# Altium PCB 6502_VGA.PcbDoc
Units mil, origin at the board's own origin, x right, y up, seen from the top; angles counter-clockwise.
Board outline 4705 x 3485 mil, 2 copper layers (Top Layer, Bottom Layer); 33 components, 97 nets, 445 pads, 29 vias.
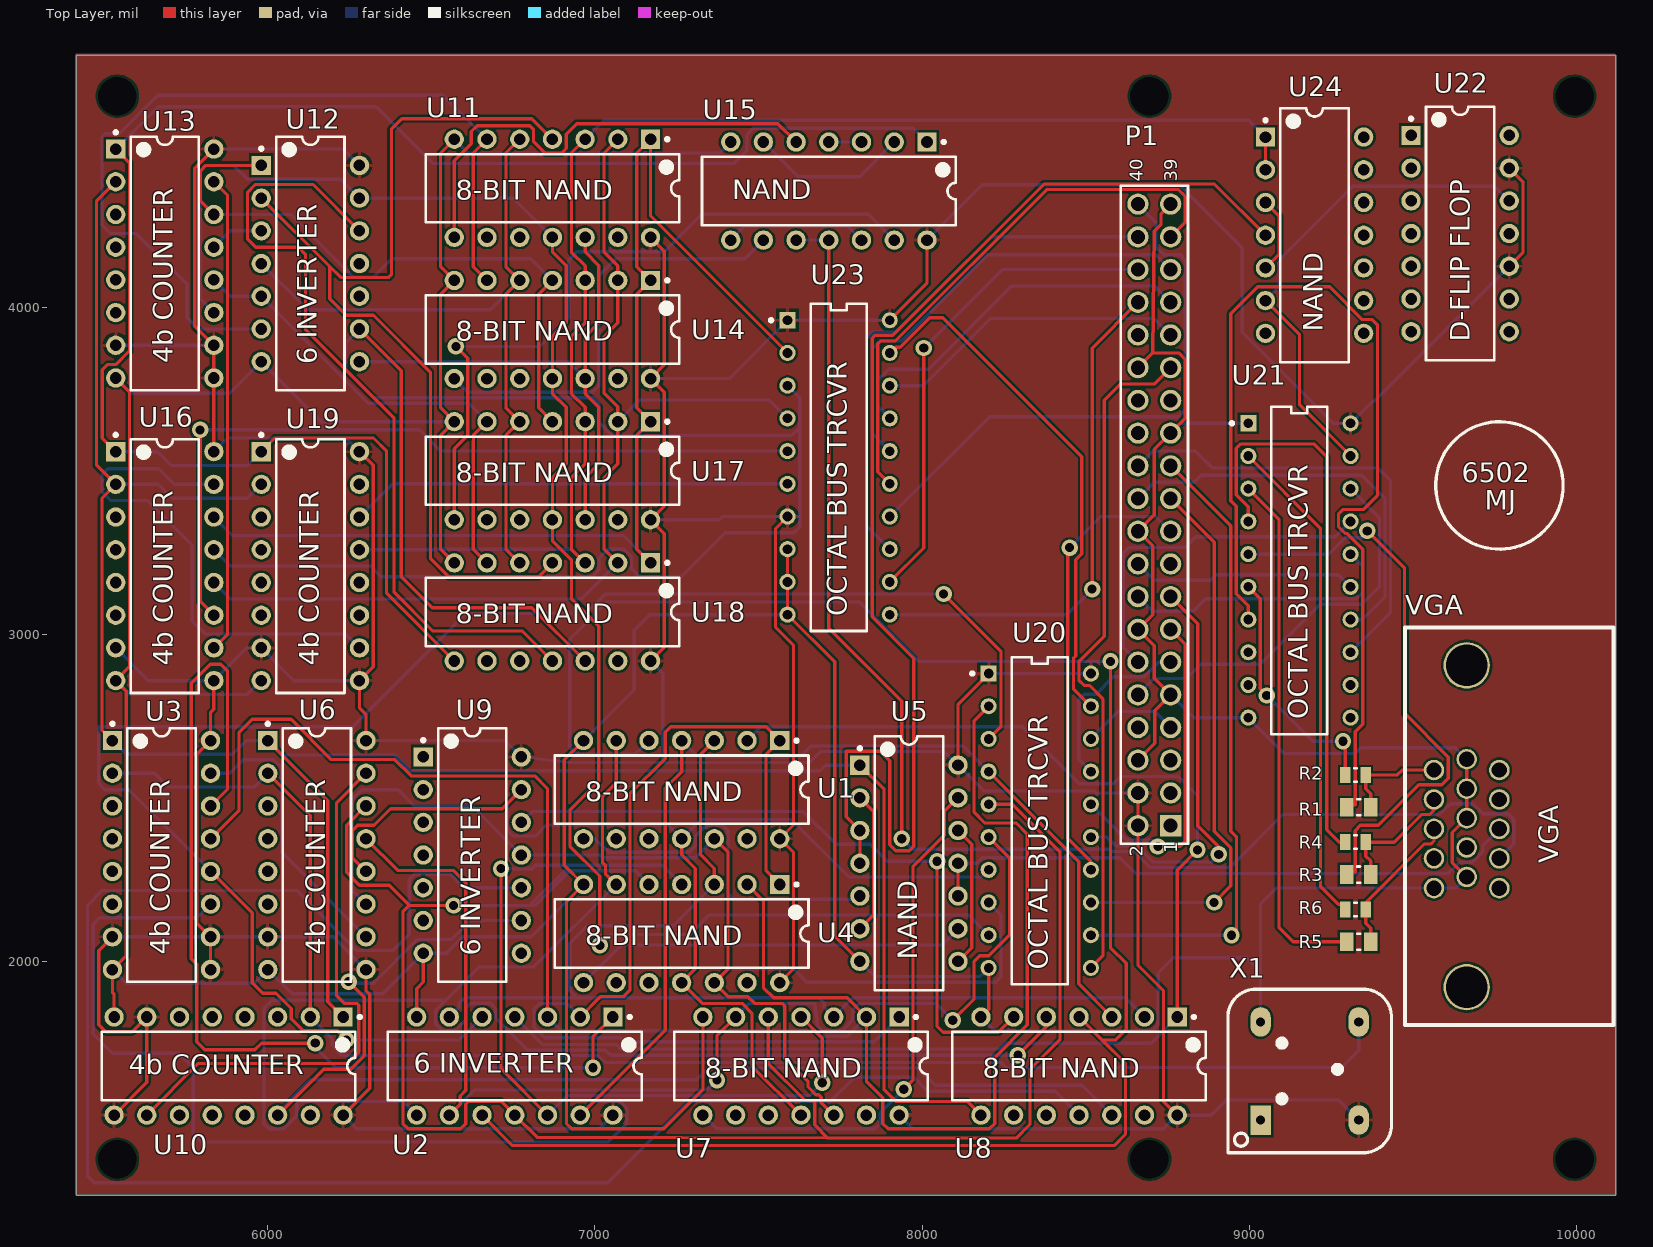
[diagram p0: Top Layer view]
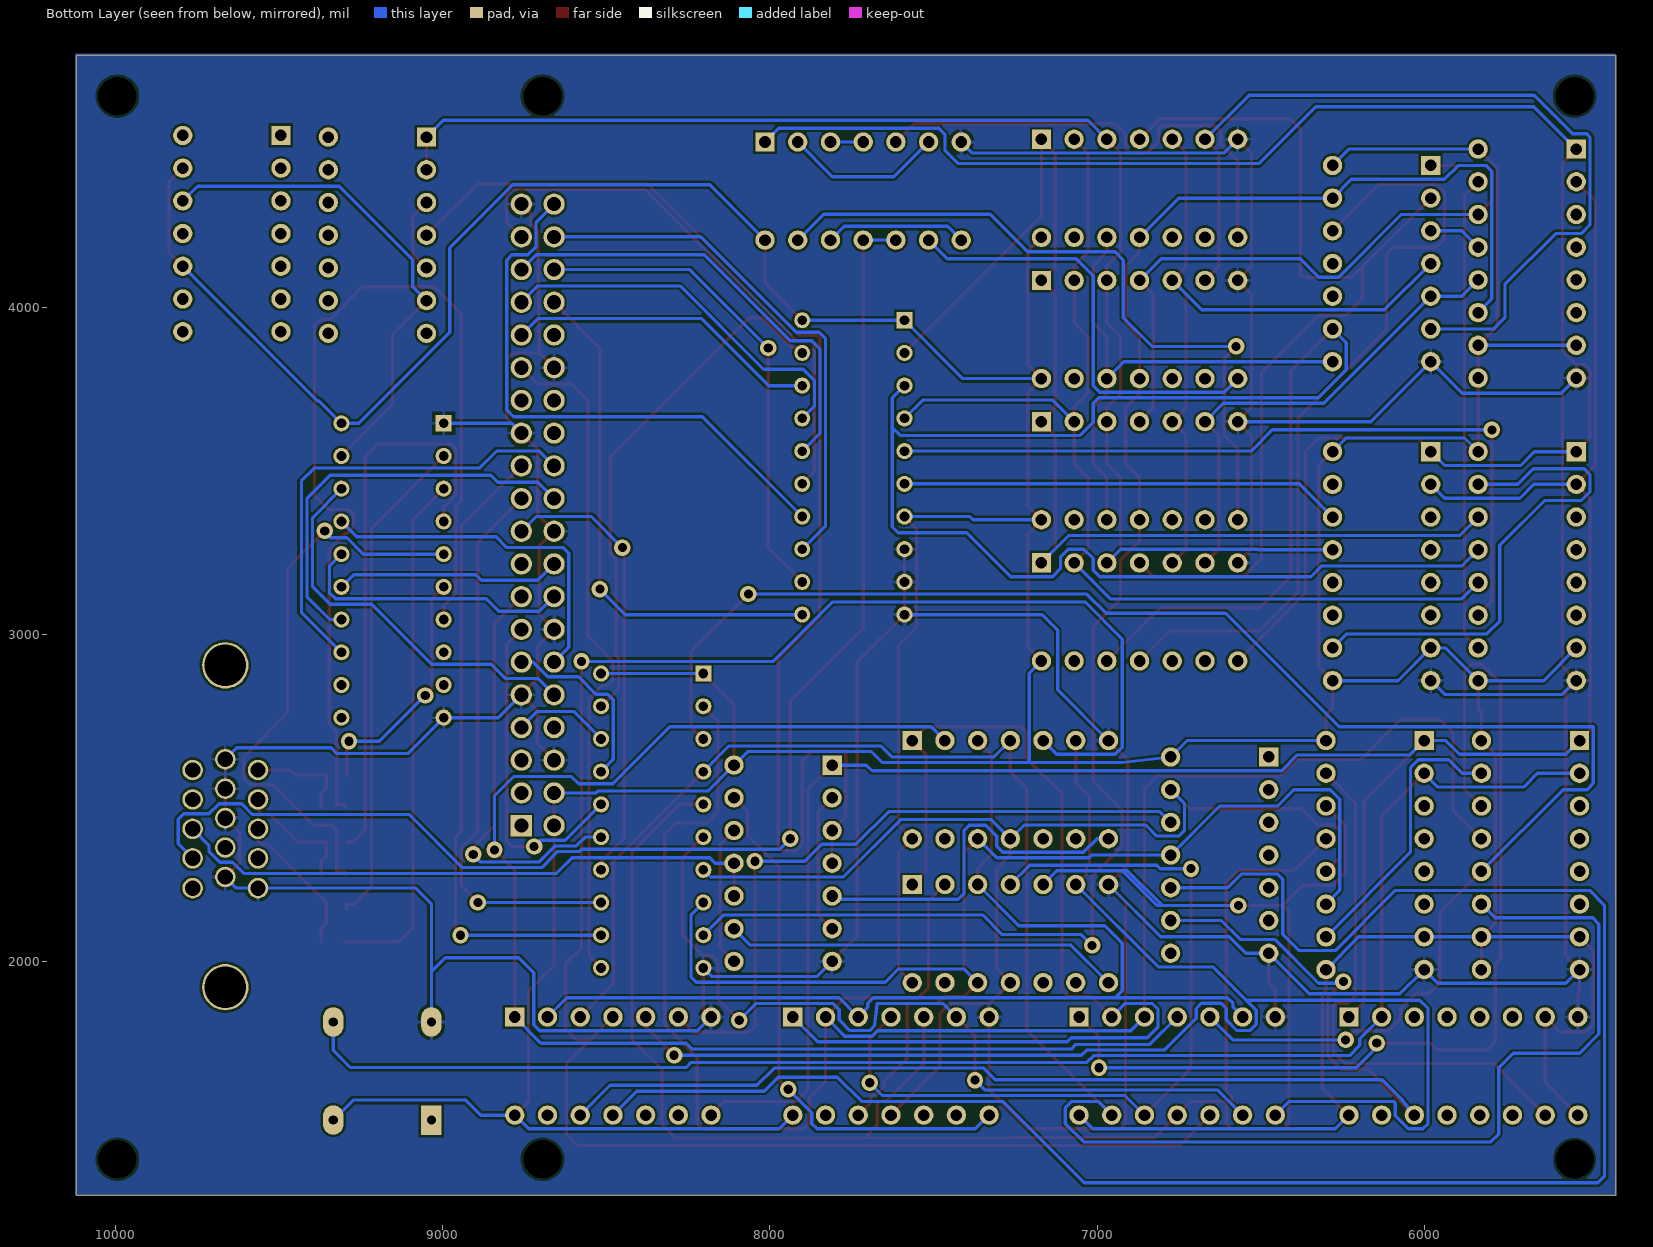
[diagram p1: Bottom Layer view, seen from below]

## Layer stack, top to bottom
Top Solder: solder mask 0.4, Solder Resist, Dk 3.5
Top Layer: signal copper 1.4
Dielectric 1: dielectric 12.6, FR-4, Dk 4.8
Bottom Layer: signal copper 1.4
Bottom Solder: solder mask 0.4, Solder Resist, Dk 3.5

## Board outline
5415,1285 5415,4770 10120,4770 10120,1285

## Design rules (kind name [scope] priority, off if disabled: settings)
Clearance [All] p1: gap=7 ignorepadtopadclearanceinfootprint=FALSE except(0: Arc-Hole Track-Hole SMDPad-Hole THPad-Hole Via-Hole Fill-Hole Poly-Hole Region-Hole Text-Hole; 4: Arc-Text Track-Text SMDPad-Text THPad-Text Via-Text Fill-Text Poly-Text Region-Text Text-Text; 10: Via-Via)
PolygonConnect [All] p1: connectstyle=Relief reliefconductorwidth=10 reliefentries=4 polygonreliefangle="90 Angle" airgapwidth=10
RoomDefinition vertical_counter [InComponentClass('vertical_counter')] p1: confinementstyle=ConfineIn formatcopy=TRUE lockcomponents=FALSE outline 5430,2638.33 8195,2638.33 8195,4678.33 5430,4678.33
RoomDefinition VGA_driver [InComponentClass('VGA_driver')] p2: confinementstyle=ConfineIn formatcopy=TRUE lockcomponents=FALSE outline 6895,1330 10245,1330 10245,4725 6895,4725
RoomDefinition horizontal_counter [InComponentClass('horizontal_counter')] p3: confinementstyle=ConfineIn formatcopy=TRUE lockcomponents=FALSE outline 5420,1335 9000,1335 9000,2855 5420,2855
RoomDefinition 6502_connection [InComponentClass('6502_connection')] p4: confinementstyle=ConfineIn formatcopy=TRUE lockcomponents=FALSE outline 8560,2200 8965,2200 8965,4545 8560,4545
RoutingVias [All] p1: holewidth=28 width=50 viastyle="Through Hole" minholewidth=12.2 minwidth=16.14 maxholewidth=12.2 maxwidth=16.14
SolderMaskExpansion SolderMaskExpansion_1 [IsVia] p1: expansion=4 istentingtop=TRUE
SolderMaskExpansion [All] p2: expansion=4 istentingtop=FALSE
Width [All] p1: maxlimit=30 minlimit=6 preferedwidth=10 minimp=50.000000 maximp=50.000000 favimp=50.000000
30 further rules are at their usual default settings.

## Classes and differential pairs
component class VGA_driver: R1 R2 R3 R4 R5 R6 U20 U21 U22 U23 U24 VGA X1
component class vertical_counter: U11 U12 U13 U14 U15 U16 U17 U18 U19
component class horizontal_counter: U1 U2 U3 U4 U5 U6 U7 U8 U9 U10
component class 6502_connection: P1

## Components (designator, comment, footprint, x,y, rotation, side; value= is the part's Value field where it differs from the comment)
P1 "61304021121" 61304021121 8710,3365 r90 top
R1 "CRCW0805680RFKEA" RESC2013X50X30NL20T20 9335,2471.15 r180 top
R2 "RC0805FR-071K5L" RESC2013X60X35LL10T20 9325.16,2570 r180 top
R3 "CRCW0805680RFKEA" RESC2013X50X30NL20T20 9335,2265.57 r180 top
R4 "RC0805FR-071K5L" RESC2013X60X35LL10T20 9325.16,2364.43 r180 top
R5 "CRCW0805680RFKEA" RESC2013X50X30NL20T20 9335,2060 r180 top
R6 "RC0805FR-071K5L" RESC2013X60X35LL10T20 9325.16,2158.85 r180 top
U1 "SN74LS30N" N0014A 7265,2525 r270 top
U2 "SN74LS04N" N0014A 6755,1680 r270 top
U3 "SN74LS161AN" N0016A 5675,2325 r0 top
U4 "SN74LS30N" N0014A 7265,2085 r270 top
U5 "SN74LS00N" N0014A 7960,2300 r0 top
U6 "SN74LS161AN" N0016A 6150,2325 r0 top
U7 "SN74LS30N" N0014A 7630,1680 r270 top
U8 "SN74LS30N" N0014A 8480,1680 r270 top
U9 "SN74LS04N" N0014A 6625,2325 r0 top
U10 "SN74LS161AN" N0016A 5880,1680 r270 top
U11 "SN74LS30N" N0014A 6870,4363.33 r270 top
U12 "SN74LS04N" N0014A 6130,4133.33 r0 top
U13 "SN74LS161AN" N0016A 5685,4133.33 r0 top
U14 "SN74LS30N" N0014A 6870,3931.67 r270 top
U15 "SN74LS00N" N0014A 7715,4355 r270 top
U16 "SN74LS161AN" N0016A 5685,3208.33 r0 top
U17 "SN74LS30N" N0014A 6870,3500 r270 top
U18 "SN74LS30N" N0014A 6870,3068.33 r270 top
U19 "SN74LS161AN" N0016A 6130,3208.33 r0 top
U20 "SN74LS245N" FP-N0020A-MFG 8360,2430 r0 top
U21 "SN74LS245N" FP-N0020A-MFG 9153.7,3195 r0 top
U22 "SN74HC74N" N0014A 9645,4225 r0 top
U23 "SN74LS245N" FP-N0020A-MFG 7745,3510 r0 top
U24 "SN74LS00N" N0014A 9200,4220 r0 top
VGA "VGA D Sub Connector" VGA 9664.13,2434 r90 top
X1 "OSC-12.9MM-10MHZ" OSC_THT_12-9MM 9190,1670 r0 top

## Footprints (in the part's own frame and the unit in brackets; to place one, negate y for a bottom-side part, rotate by r counter-clockwise, add the part's x,y. Pads: shape width x height; smd on the part's side, far side on the other; paste and mask are expansions set on the pad)
61304021121 [mm] "Pin Header, pitch 2.54 mm, THT, Vertical, dual row, 40p"
  rect 1.65x1.65 hole 1.1: 1(-24.13,-1.27)
  round 1.65 hole 1.1: 2(-24.13,1.27) 3(-21.59,-1.27) 4(-21.59,1.27) 5(-19.05,-1.27) 6(-19.05,1.27) 7(-16.51,-1.27) 8(-16.51,1.27) 9(-13.97,-1.27) 10(-13.97,1.27) 11(-11.43,-1.27) 12(-11.43,1.27) 13(-8.89,-1.27) 14(-8.89,1.27) 15(-6.35,-1.27) 16(-6.35,1.27) 17(-3.81,-1.27) 18(-3.81,1.27) 19(-1.27,-1.27) 20(-1.27,1.27) 21(1.27,-1.27) 22(1.27,1.27) 23(3.81,-1.27) 24(3.81,1.27) 25(6.35,-1.27) 26(6.35,1.27) 27(8.89,-1.27) 28(8.89,1.27) 29(11.43,-1.27) 30(11.43,1.27) 31(13.97,-1.27) 32(13.97,1.27) 33(16.51,-1.27) 34(16.51,1.27) 35(19.05,-1.27) 36(19.05,1.27) 37(21.59,-1.27) 38(21.59,1.27) 39(24.13,-1.27) 40(24.13,1.27)
  silkscreen extent -25.55,-2.61 25.55,2.61, body extent -25.4,-2.54 25.4,2.54, height 8.59
FP-N0020A-MFG [mm]
  rect 1.25x1.25 hole 0.75 paste-1000 mask+0: 1(-3.97,11.43)
  round 1.25 hole 0.75 paste-1000 mask+0: 2(-3.97,8.89) 3(-3.97,6.35) 4(-3.97,3.81) 5(-3.97,1.27) 6(-3.97,-1.27) 7(-3.97,-3.81) 8(-3.97,-6.35) 9(-3.97,-8.89) 10(-3.97,-11.43) 11(3.97,-11.43) 12(3.97,-8.89) 13(3.97,-6.35) 14(3.97,-3.81) 15(3.97,-1.27) 16(3.97,1.27) 17(3.97,3.81) 18(3.97,6.35) 19(3.97,8.89) 20(3.97,11.43)
  silkscreen extent -5.37,-12.7 2.18,12.7, body extent -4.69,-13.56 4.69,13.56, height 0.25
N0014A [mm] "DIP, 14-Leads, Body 19.7x6.6mm, Pitch 2.54mm"
  rect 1.5x1.5 hole 0.9: 1(-3.81,7.62)
  round 1.5 hole 0.9: 2(-3.81,5.08) 3(-3.81,2.54) 4(-3.81,0) 5(-3.81,-2.54) 6(-3.81,-5.08) 7(-3.81,-7.62) 8(3.81,-7.62) 9(3.81,-5.08) 10(3.81,-2.54) 11(3.81,0) 12(3.81,2.54) 13(3.81,5.08) 14(3.81,7.62)
  silkscreen extent -3.93,-9.85 2.65,9.85, body extent -3.95,-9.85 3.95,9.85, height 5.08
N0016A [mm] "DIP, 16-Leads, Body 19.7x6.6mm, Pitch 2.54mm"
  rect 1.5x1.5 hole 0.9: 1(-3.81,8.89)
  round 1.5 hole 0.9: 2(-3.81,6.35) 3(-3.81,3.81) 4(-3.81,1.27) 5(-3.81,-1.27) 6(-3.81,-3.81) 7(-3.81,-6.35) 8(-3.81,-8.89) 9(3.81,-8.89) 10(3.81,-6.35) 11(3.81,-3.81) 12(3.81,-1.27) 13(3.81,1.27) 14(3.81,3.81) 15(3.81,6.35) 16(3.81,8.89)
  silkscreen extent -3.93,-9.85 2.65,10.31, body extent -3.95,-9.85 3.95,9.85, height 5.08
OSC_THT_12-9MM [mil]
  rect 62x90 hole 27.56: 1(-155,-155)
  oval 62x90 hole 27.56: 2(145,-155) 3(145,145) 4(-155,145)
  silkscreen extent -255,-255 245,245, body extent -260,-260 250,250, height 220
RESC2013X50X30NL20T20 [mm] "Chip Resistor, 2-Leads, Body 2.00x1.25mm, IPC Medium Density"
  rect 1.05x1.45 smd: 1(-0.925,0) 2(0.925,0)
  silkscreen extent -0.1,-0.63 0.1,0.62, body extent -1.1,-0.72 1.1,0.72, height 0.5
RESC2013X60X35LL10T20 [mm]
  rect 0.8x1.25 smd: 1(-0.8,0) 2(0.8,0)
  silkscreen extent -0.1,-0.53 0.1,0.53, body extent -1.05,-0.67 1.05,0.67, height 0.6
VGA [mil]
  round 62.7 hole 47: 1(151,99.13) 2(61,99.13) 3(-29,99.13) 4(-119,99.13) 5(-210,99.13) 6(184,-0.87) 7(94,-0.87) 8(4,-0.87) 9(-86,-0.87) 10(-176,-0.87) 11(151,-100.87) 12(61,-100.87) 13(-29,-100.87) 14(-119,-100.87) 15(-210,-100.87)
  round 141.7 hole 126: 16(471,-0.87) 17(-513,-0.87)
  silkscreen extent -629,-450 587,188

## Part data
P1: library part CMP-1502-01135-1, "THT Vertical Pin Header WR-PHD, Pitch 2.54 mm, Dual Row, 40 pins", Contact Resistance=20mOhm, Manufacturer="Wurth Elektronik", Operating Temperature=-40to105degC, Rated Current=3A, Withstanding Voltage=500VAC, Working Voltage=250VAC, Datasheet URL=https://katalog.we-online.de/em/datasheet/6130xx21121.pdf, Gender=Male, Manufacturer URL=http://www.we-online.de, Mounting Technology=THT, Orientation=Vertical, Package Reference=61304021121, Packaging=Bag, Part Number=61304021121, Pin Number=40, Pitch=2.54mm, Publisher=WurthElektronik, Row Number=Dual
R1 R3 R5: library part CMP-2001-04066-1, Manufacturer="Vishay Dale", Resistance=680, Part Number=CRCW0805680RFKEA
R2 R4 R6: library part CMP-1659-00010-2, "RES 1.50K OHM 1/8W 1% 0805 SMD", Manufacturer=Yageo, Resistance=1.5K, ComponentLink1Description=Datasheet, ComponentLink1URL=http://www.yageo.com/documents/recent/PYu-RC_Group_51_RoHS_L_04.pdf, PackageReference=0805, PartNumber=RC0805FR-071K5L
U1 U4 U7 U8 U11 U14 U17 U18: library part CMP-1627-00459-2, "8-input positive-NAND gates, N0014A, TUBE", F @ Nom Voltage(Max)(Mhz)=35, Generic Part Number=SN74LS30, ICC @ Nom Voltage(Max)(mA)=0.006, Manufacturer="Texas Instruments", Operating Temperature Range(C)="0 to 70", Rating=Catalog, tpd @ Nom Voltage(Max)(ns)=22, Voltage(Nom)(V)=5, Bits(#)=1, Code_JEDEC=MS-001, DatasheetVersion=SDLS099, Input Type=TTL, Output Drive (IOL/IOH)(Max)(mA)=0.4/-16, Output Type=TTL, PackageReference=N0014A, Schmitt Trigger=No, Technology Family=LS, VCC(Max)(V)=5.25, VCC(Min)(V)=4.75
U2 U9 U12: library part CMP-1615-00911-2, "Hex inverters, N0014A, TUBE", F @ Nom Voltage(Max)(Mhz)=35, Generic Part Number=SN74LS04, ICC @ Nom Voltage(Max)(mA)=0.033, Manufacturer="Texas Instruments", Operating Temperature Range(C)="0 to 70", Rating=Catalog, tpd @ Nom Voltage(Max)(ns)=22, Voltage(Nom)(V)=5, Bits(#)=6, Code_JEDEC=MS-001, DatasheetVersion=SDLS029C, Input Type=TTL, Output Drive (IOL/IOH)(Max)(mA)=-0.4/8, Output Type=CMOS, PackageReference=N0014A, Schmitt Trigger=No, Technology Family=LS, VCC(Max)(V)=5.25, VCC(Min)(V)=4.75
U3 U6 U10 U13 U16 U19: library part CMP-1623-00512-2, "Synchronous 4-Bit Binary Counters, N0016A, TUBE", F @ Nom Voltage(Max)(Mhz)=35, Generic Part Number=SN74LS161A, ICC @ Nom Voltage(Max)(mA)=32, Manufacturer="Texas Instruments", Operating Temperature Range(C)="0 to 70", Rating=Catalog, Voltage(Nom)(V)=5, Bits(#)=4, Code_JEDEC=MS-001, DatasheetVersion=SDLS060, Function=Counter, Input Type=TTL, Inputs=1, Output Drive (IOL/IOH)(Max)(mA)=8/-0.4, Output Type=CMOS, PackageReference=N0016A, Schmitt Trigger=No, Technology Family=LS, tpd @ Nom Voltage(Max)(ns)=35, Type=Binary, VCC(Max)(V)=5.25, VCC(Min)(V)=4.75
U5 U15 U24: library part CMP-1627-00476-2, "Quad 2-input positive-NAND gates, N0014A, TUBE", F @ Nom Voltage(Max)(Mhz)=35, Generic Part Number=SN74LS00, ICC @ Nom Voltage(Max)(mA)=0.022, Manufacturer="Texas Instruments", Operating Temperature Range(C)="0 to 70", Rating=Catalog, tpd @ Nom Voltage(Max)(ns)=22, Voltage(Nom)(V)=5, Bits(#)=4, Code_JEDEC=MS-001, DatasheetVersion=SDLS025B, Input Type=TTL, Output Drive (IOL/IOH)(Max)(mA)=0.4/-16, Output Type=TTL, PackageReference=N0014A, Schmitt Trigger=No, Technology Family=LS, VCC(Max)(V)=5.25, VCC(Min)(V)=4.75
U20 U21 U23: library part CMP-1620-00419-3, "IC TXRX NON-INVERT 5.25V 20DIP", Case/Package=PDIP, High Level Output Current=-15mA, Low Level Output Current=24mA, Max Operating Temperature=70°C, Max Supply Voltage=5.25V, Min Operating Temperature=0°C, Min Supply Voltage=4.75V, Operating Supply Voltage=5V, Package Quantity=20, Quiescent Current=62mA, Contact Plating=Gold, Direction=Bidirectional, Height=4.57mm, Lead Free="Lead Free", Length=24.33mm, Logic Function=Transceiver, Mount="Through Hole", Number of Bits=8, Number of Bits per Element=8, Number of Channels=8, Number of Circuits=8, Number of Elements=1, Number of Outputs=8, Number of Pins=20, Number of Transceivers=8, Packaging=Rail/Tube, Polarity=Non-Inverting, Propagation Delay=12ns, Radiation Hardening=No, REACH SVHC="No SVHC", RoHS Compliant=Yes, Termination="Through Hole", Turn-On Delay Time=12ns, Weight=0.042297oz, Width=6.35mm
U22: library part CMP-1616-00096-3, "Dual D-Type Positive-Edge-Triggered Flip-Flops With Clear and Preset, N0014A, TUBE", F @ Nom Voltage(Max)(Mhz)=28, Generic Part Number=SN74HC74, ICC @ Nom Voltage(Max)(mA)=0.04, Manufacturer="Texas Instruments", Operating Temperature Range(C)="-40 to 85", Rating=Catalog, tpd @ Nom Voltage(Max)(ns)=37, Voltage(Nom)(V)=3.3,5, 3-State Output=No, Bits(#)=2, Code_JEDEC=MS-001, DatasheetVersion=SCLS094D, Input Type=CMOS, Output=3S, Output Drive (IOL/IOH)(Max)(mA)=5.2/-5.2, Output Logic=Inverted,Non-inverted, Output Type=CMOS, PackageReference=N0014A, Schmitt Trigger=No, Technology Family=HC, VCC(Max)(V)=6, VCC(Min)(V)=2
VGA: library part VGA-002
X1: library part OSC-12.9MM-1MHZ, "12.9MM x 12.9MM, 1MHz Can Oscillator"

## Free pads (board coordinates)
  round 60 hole 118.11: 2(5540,1395) 2(5540,4645) 2(8695,1394.98) 2(8695,4644.98) 2(9995,1395) 2(9995,4645)

## Via types
v1: diameter 50, hole 28, Top Layer to Bottom Layer, tented both sides, 29 vias

## Nets (pads, with @x,y where several pads share a name; then routed paths per layer and width w, separated by ;. In a path a pad name is that pad's centre, name@x,y a point inside that pad or via, vN(x,y) a via of type N, cw(c..) or ccw(c..) an arc to the next point about the centre after c; other vN are vias at no path point)
+3V3: P1.1
+5: P1.2 P1.4 U1.14 U2.14 U3.7 U3.9 U3.10 U3.16 U4.14 U5.14 U6.7 U6.9 U6.16 U7.14 U8.14 U9.14 U10.7 U10.9 U10.16 U11.14 U12.14 U13.7 U13.9 U13.10 U13.16 U14.14 U15.14 U16.7 U16.9 U16.16 U17.14 U18.14 U19.7 U19.9 U19.16 U20.1 U20.20 U21.20 U22.10 U22.13 U23.1 U23.7 U23.20 X1.2 | length 21094
  Top Layer w10: U3.7 5483,2033 5483,1806 5504,1785 5585,1785 U10.7 5630,1630 U10.9 ; U3.9 U3.10 5783,2117 5783,2633 U3.16 5825,2761 5835,2771 U16.9 ; U16.16 U13.9 U13.10 5776.47,3941.86 5776.47,4424.81 U13.16 ; U10.16 6311.7,1611.7 6311.7,1899.35 6300,1911.06 U6.9 ; U19.16 6322,3516.33 6322,2900.33 U19.9 6280,2776 6300,2756 U6.16 ; U18.14 7212,2960.33 7212,3308 U17.14 7212,3392 7212,3739.67 U14.14 7212,3823.67 7212,4171.33 U11.14 ; U4.14 7607,1977 7607,2333 U1.14 7607,2417 7607,2967 7552,3022 7552,3323.3 U23.7 ; U23.20 8015,4073.7 U15.14 ; U5.14 8110,2786.3 U20.1 ; P1.4 P1.2 8660,1989 8738,1911 8738,1572 U8.14 ; U22.10 9837,4167 9837,4383 U22.13
  Bottom Layer w10: U3.7 U3.10 U6.7 6200,2075 U6.9 ; U16.7 5635,2858.33 U16.9 5935,2958.33 U19.7 6080,2858.33 U19.9 ; U13.7 U13.10 ; U16.16 5876.67,3600 6238.33,3600 U19.16 ; U13.16 6230,4483.33 U12.14 ; U10.16 6272,1488 7013,1488 U2.14 ; U6.16 6725,2675 U9.14 6923.47,2608 7207,2608 ; U18.14 7207,2881.33 7207,2608 ; U17.14 7379,3350 7389,3360 U23.7 ; U14.14 7410.37,3781.67 U23.1 U23.20 ; U7.14 7972,1488 8738,1488 U8.14 8884,1530 8930,1576 9274,1576 X1.2 ; U15.14 8184,4374 8786,4374 8979,4181 8979,3923 9257,3645 U21.20 9378,3713 9383,3713 U22.10 ; U20.1 U20.20 ; P1.4 8531,2515 8524.85,2521.15 8188.85,2521.15 U5.14 8068.47,2641.53 7689.53,2641.53 7656,2608 7207,2608
A0: P1.7 U20.18 | length 298.8
  Bottom Layer w10: U20.18 8600.3,2764 8711,2764 P1.7
A1: P1.11 U20.17 | length 564.1
  Bottom Layer w10: U20.17 8479,2617.3 8479,2800 8496,2817 8532,2817 8585,2870 8679,2870 8724,2915 P1.11
A2: P1.13 U20.16 | length 1014.8
  Top Layer w10: v1(8721,2351) 8788,2351 8805,2368 8805,2970 P1.13
  Bottom Layer w10: U20.16 8626.3,2370 8702,2370 v1(8721,2351)
A3: P1.15 U20.15 | length 1280.8
  Top Layer w10: P1.15 8843,3032 8843,2414 8907,2350 v1(8907,2327)
  Bottom Layer w10: U20.15 8565,2380 8592,2353 8657,2353 8706.23,2303.77 8883.77,2303.77 v1(8907,2327)
A4: P1.19 U20.14 | length 1383.4
  Top Layer w10: v1(8451,3265) 8445.69,3259.69 8445.69,2376.31 8516.3,2305.7 U20.14
  Bottom Layer w10: v1(8451,3265) 8546,3360 8715,3360 P1.19
A5: P1.21 U20.13 | length 1709
  Top Layer w10: P1.21 8893,3282 8893,2397.77 8944,2346.77 8944,2231 v1(8893,2180)
  Bottom Layer w10: U20.13 v1(8893,2180)
A6: P1.23 U20.12 | length 1954.2
  Top Layer w10: P1.23 8943.79,3331.21 8943.79,2398.21 8961,2381 8961,2095 v1(8946,2080)
  Bottom Layer w10: U20.12 v1(8946,2080)
A7: P1.29 U20.11 | length 2067
  Top Layer w10: U20.11 8553,2016.7 8553,2802.39 8512,2843.39 8496,2843.39 8479.69,2859.7 8479.69,2916.61 8557,2993.92 8557,3716 8606,3765 8710,3765 P1.29
A8: P1.31 U23.18 | length 964.3
  Bottom Layer w10: U23.18 8004.11,3760 8209.11,3965 8710,3965 P1.31
A9: P1.33 U23.17 | length 1167.9
  Bottom Layer w10: U23.17 7864,3697.3 7864,3776 7898,3810 8019.67,3810 8274.67,4065 8710,4065 P1.33
A10: P1.35 U23.16 | length 1385.4
  Bottom Layer w10: U23.16 7847,3614.3 7847,3872 7872,3897 7938,3897 8201,4160 8715,4160 P1.35
A11: P1.37 U23.15 | length 1729.6
  Top Layer w10: U23.15 7864.69,3496.61 7864.69,3888 7873.3,3896.61 7917.85,3896.61 8380.72,4359.48 8784,4359.48 8805,4338.48 8805,4260 P1.37
A12: P1.40 U23.14 | length 1756.5
  Bottom Layer w10: U23.14 8206.3,3665 8784,3665 8805,3686 8805,4144 8789,4160 8740,4160 8715,4185 8715,4260 P1.40
A13: P1.38 U23.13 | length 1632.4
  Bottom Layer w10: U23.13 7830,3331.3 7830,3904 7849,3923 7920,3923 8212,4215 P1.38
A14: P1.36 U23.12 | length 1512.4
  Top Layer w10: U23.12 8005,3263.7 v1(8005,3875)
  Bottom Layer w10: v1(8005,3875) 8245,4115 P1.36
A15: P1.34 U23.11 | length 1586
  Top Layer w10: v1(8520,3138) 8520,3875 P1.34
  Bottom Layer w10: U23.11 8442,3060 v1(8520,3138)
C\L\K\: P1.3
D0: P1.10 U21.18 | length 1211.2
  Bottom Layer w10: P1.10 8710,2865 8809,2865 8852,2908 9034,2908 9217.39,3091.39 9344,3091.39 9398.36,3145.75 9398.36,3356.64 U21.18
D1: P1.12 U21.17 | length 1086.8
  Bottom Layer w10: P1.12 8615,2960 8615,3248 8632,3265 8804,3265 8837,3298 9263,3298 U21.17
D2: P1.16 U21.16 | length 862
  Bottom Layer w10: P1.16 8705,3070 8829,3070 8867.39,3108.39 9328,3108.39 9346.61,3127 9346.61,3208.39 U21.16
D3: P1.18 U21.15 | length 693.1
  Bottom Layer w10: P1.18 8710,3165 8882,3165 8899,3182 9273,3182 U21.15
D4: P1.22 U21.14 | length 1248.1
  Bottom Layer w10: P1.22 8710,3465 8832,3465 8853,3486 9344,3486 9415.36,3414.64 9415.36,3115.36 9345,3045 U21.14
D5: P1.24 U21.13 | length 1403.2
  Bottom Layer w10: P1.24 8705,3560 8836,3560 8888,3508 9393,3508 9432.36,3468.64 9432.36,3067.36 U21.13
D6: P1.26
D7: P1.32
GND: P1.6 P1.9 P1.14 P1.20 P1.25 P1.30 P1.39 U1.7 U2.7 U3.8 U4.7 U5.7 U6.8 U7.7 U8.7 U9.7 U10.8 U11.7 U12.7 U13.8 U14.7 U15.7 U16.8 U17.7 U18.7 U19.8 U20.10 U21.1 U21.10 U23.8 U23.9 U23.10 VGA.5 VGA.6 VGA.7 VGA.8 VGA.10 X1.4 | length 18356.8
  Top Layer w10: U10.8 5530,1900 5525,1905 U3.8 5567,2017 5567,2826.33 U16.8 5577,2900.33 5577,3741.33 U13.8 ; U2.7 6455,1917 6475,1937 U9.7 ; U18.7 6528,3260.33 6528,3608 U17.7 6528,3692 6528,4039.67 U14.7 6528,4123.67 6528,4471.33 U11.7 ; U1.7 6906.47,2616.47 6906.47,2293.53 U4.7 6913,2183 6913,1504 6929,1488 7211,1488 7330,1607 U7.7 ; U23.8 U23.9 U23.10 7733,2915.7 7733,2077 U5.7 ; U8.7 8203.7,1853.7 U20.10 ; P1.6 8711.72,2666.72 8711.72,2766.72 P1.9 8710,2865 8710,2965 P1.14 8705,3060 8705,3270 P1.20 8710,3365 8710,3565 P1.25 8805,3660 8805,3840 8785,3860 8705,3860 ; P1.30 8705,3860 ; P1.39 8730.77,4285.77 8730.77,4253.52 8710,4232.75 8705,3860 ; VGA.10 9621,2302 9621,2394 VGA.8 VGA.7 VGA.6
  Bottom Layer w10: U3.8 5567,1933 5958,1933 U6.8 6074,1901 6351,1901 U9.7 6546.09,2025 6596.09,2075 6805,2075 U4.7 ; U16.8 5577.33,2816 5937.67,2816 U19.8 ; U13.8 5581.33,3737 5883.67,3737 U12.7 6163.33,3650 U17.7 ; U11.7 6612.33,4471 7381,4471 U15.7 ; U1.7 7120,2830 7120,3012 7168,3060 U23.10 ; U5.7 7856,1954 8177.7,1954 U20.10 ; U8.7 8222,1788 8704,1788 8722,1806 8722,1965 8768,2011 8992,2011 9035,1968 ; P1.9 8830,2745 U21.10 9107.06,2635.34 9324,2635.34 9341.66,2653 9630,2653 VGA.6 ; P1.25 8790,3645 U21.1 ; X1.4 9035,1968 ; VGA.10 9631,2224 VGA.5 9083,2224 9035,2176 9035,1968
NetR1_1: R1.1 R2.1 VGA.1 | length 319.5
  Top Layer w10: R1.1 9371.42,2513 9356.65,2527.76 R2.1 9453,2570 9468,2585 VGA.1
NetR1_2: R1.2 U21.7 | length 3116.8
  Top Layer w10: U21.7 8997.4,3087.6 8960.79,3124.21 8960.79,3391.39 8943.79,3408.39 8943.79,3979.79 9026,4062 9246,4062 9346,3962 9376,3962 9392,3946 9392,3424 9349.61,3381.61 9287,3381.61 9273.39,3368 9273.39,3328 9293,3308.39 9298.78,3308.39 9347,3260.17 9347,2725 9324,2702 9324,2479 9298.58,2479 R1.2
NetR2_2: R2.2 U21.6 | length 752.2
  Top Layer w10: U21.6 9034.01,3108.39 9034.01,2832.99 v1(9054,2813) ; v1(9287,2673) 9293.66,2666.34 R2.2
  Bottom Layer w10: v1(9054,2813) 9194,2673 v1(9287,2673)
NetR3_1: R3.1 R4.1 VGA.2 | length 386.9
  Top Layer w10: R4.1 R4.1@9356.65,2364 ; R3.1 9371.42,2307 9356.65,2321.76 R4.1@9356.65,2364 ; VGA.2 9565,2462 9552,2449 9528,2449 9443,2364 R4.1@9356.65,2364
NetR3_2: R3.2 U21.5 | length 1765.2
  Top Layer w10: R3.2 9298.58,2273 9324,2273 9324,2400 9340,2416 9395,2416 9519,2540 9589,2540 9609,2560 9609,2624 9475,2758 9475,3202 v1(9361,3316)
  Bottom Layer w10: U21.5 9243,3245 9293,3295 9344,3295 9361,3312 v1(9361,3316)
NetR4_2: R4.2 U21.4 | length 1749.6
  Top Layer w10: U21.4 8997.4,3390.2 8960.79,3426.8 8960.79,3568 8974.79,3582 9198,3582 9237,3543 9237,2403 9276,2364 9293.66,2364 R4.2
NetR5_1: R5.1 R6.1 VGA.3 | length 449.1
  Top Layer w10: R5.1 9371.42,2102 9356.65,2116.76 R6.1 9356.65,2179.65 9536,2359 9556,2359 9565,2368 VGA.3
NetR5_2: R5.2 U21.3 | length 1605.6
  Top Layer w10: U21.3 9091.01,3351.39 9091.01,2103.99 9135,2060 R5.2
NetR6_2: R6.2 U21.2 | length 1521
  Top Layer w10: U21.2 9218,3324.4 9218,2229 9273,2174 9293.66,2174 R6.2
NetU1_8: U1.8 U5.5 | length 1131.4
  Bottom Layer w10: U1.8 7000,2375 7041.53,2333.47 7288,2333.47 7306.53,2352 7306.53,2382.53 7340.53,2416.53 7390.47,2416.53 7407,2400 7407,2207 7424,2190 7810,2190 U5.5
NetU3_1: U3.1 U5.1 U6.1 U8.8 U10.1 U13.2 U16.2 U19.2 | length 6923.7
  Top Layer w10: U3.1 5493,2707 5493,3416.33 U16.2 5476.47,3516.86 5476.47,4324.81 U13.2 ; U6.1 6183.53,2491.47 6183.53,1876.47 U10.1 ; U5.1 7884,2526 7884,1608 7920,1572 8138,1572 U8.8
  Bottom Layer w10: U3.1 5567,2633 5892,2633 5934,2675 U6.1 6044,2631 6388,2631 6436,2583 7688,2583 7705,2600 U5.1 ; U16.2 5664.67,3458.33 5707,3416 5937.67,3416 U19.2
NetU3_2: U3.2 U6.2 U10.2 X1.3 | length 4697.9
  Top Layer w10: U6.2 6130,2445 U10.2
  Bottom Layer w10: U3.2 5654,2575 5696,2533 5958,2533 U6.2 ; U10.2 6197.03,1762.97 6197.03,1743.12 6228.15,1712 7010,1712 7031,1691 8240.61,1691 8256,1675.61 9282.61,1675.61 9335,1728 X1.3
NetU3_15: U3.15 U6.10 | length 868.2
  Bottom Layer w10: U3.15 5884,2575 5925.53,2616.53 6017.47,2616.53 6042,2592 6042,2333 U6.10
NetU4_8: U4.8 U5.9 | length 1213.3
  Bottom Layer w10: U4.8 7080,2050 8060,2050 U5.9
NetU5_2: U5.2 U5.6 | length 434.8
  Top Layer w10: U5.6 7852,2142 7852,2458 U5.2
NetU5_3: U5.3 U5.4 U24.4 | length 3916.4
  Top Layer w10: U5.4 U5.3 7768,2442 7768,2642 7872,2642 7901,2613 7901,2357 7920,2338 7961,2338 7975,2352 7975,2926 7847.69,3053.31 7847.69,3905.3 7856,3913.61 7910.61,3913.61 8373.48,4376.48 8893.52,4376.48 U24.4
NetU5_8: U5.8 U5.12 | length 434.8
  Top Layer w10: U5.8 8152,2042 8152,2358 U5.12
NetU5_10: U5.10 U5.11 VGA.13 | length 1849.4
  Top Layer w10: U5.10 U5.11
  Bottom Layer w10: U5.11 8167,2300 8184,2317 8604.52,2317 8652.52,2269 9609,2269 9643,2303 9682,2303 9715,2336 9715,2355 VGA.13
NetU5_13: U5.13 U7.8 | length 1660.6
  Top Layer w10: v1(7944,1609) 7972,1637 7972,2289 8068.47,2385.47 8068.47,2458.47 U5.13
  Bottom Layer w10: U7.8 7372,1488 7856,1488 7872,1504 7872,1537 v1(7944,1609)
NetU6_15: U6.15 U10.10 | length 1667.4
  Top Layer w10: U10.10 5787.97,1687.97 6242.85,1687.97 6277.7,1722.82 6277.7,1865.35 6271.53,1871.53 6233.47,1871.53 6210,1895 6210,2485 U6.15
NetU11_8: U11.8 U15.5 | length 1488.4
  Top Layer w10: U11.8 6570,4448 6622,4500 6622,4537 6640,4555 6801,4555 6812,4544 6812,4507 6848,4471 6898,4471 6912,4485 6912,4529 6944,4561 7559,4561 U15.5
NetU13_1: U13.1 U15.1 U16.1 U18.8 U19.1 | length 5329.5
  Top Layer w10: U16.1 5493.47,3599.86 5493.47,3808 5510.47,3825 5536,3825 5577,3866 5577,4441.33 U13.1 ; U19.1 6021.67,3600 6323,3600 6363,3560 6363,3125.33 U18.8
  Bottom Layer w10: U16.1 5663,3558.33 5705.33,3516 5937.67,3516 U19.1 ; U13.1 5664.67,4613 6331,4613 6505,4439 7424,4439 7465,4480 7465,4528 7484,4547 7973,4547 U15.1
NetU13_15: U13.15 U16.10 | length 1459.8
  Top Layer w10: U16.10 5877,3000.33 5877,4341.33 U13.15
NetU14_8: U14.8 U15.9 | length 1351.7
  Bottom Layer w10: U14.8 6611.67,3740 6992,3740 7012,3760 7012,4096 7064,4148 7458,4148 U15.9
NetU15_2: U15.2 U15.6 | length 487.8
  Bottom Layer w10: U15.6 7621,4399 7809,4399 U15.2
NetU15_3: U15.3 U15.4 | length 100
  Bottom Layer w10: U15.4 U15.3
NetU15_8: U15.8 U15.12 | length 434.8
  Bottom Layer w10: U15.8 7457,4247 7773,4247 U15.12
NetU15_10: U15.10 U15.11 VGA.14 | length 4167.9
  Top Layer w10: U15.11 7715,3018 7938,2795 v1(7938,2375)
  Bottom Layer w10: U15.10 U15.11 ; v1(7938,2375) 7970,2343 8575.05,2343 8582.05,2336 8649,2336 8698.23,2286.77 8940.77,2286.77 9103,2449 9582,2449 9615,2482 9684,2482 9715,2451 9792,2451 9809,2434 9809,2359 VGA.14
NetU15_13: U15.13 U17.8 | length 2205.5
  Top Layer w10: U17.8 6570,3566.47 6611.53,3608 6611.53,3843.47 v1(6575,3880)
  Bottom Layer w10: v1(6575,3880) 6832,3880 6920,3968 6920,4144 6945,4169 7212,4169 7327,4284 7836,4284 U15.13
NetU16_15: U16.15 U19.10 | length 1542
  Bottom Layer w10: U16.15 5713.67,3458.33 5666,3506 5511,3506 5493,3488 5493,3436 5520,3409 5632,3409 5769,3272 5769,3040 5808,3001 6237.33,3001 U19.10
NetU20_19: U20.19 U23.19 | length 1603.3
  Top Layer w10: U23.19 7919.01,3877.71 7932.75,3877.71 8023.04,3968 8063.3,3968 8488,3543.3 8488,3246 8470,3228 8470,2933.61 8462.69,2926.3 8462.69,2833.61 U20.19
NetU21_19: U21.19 U22.12 U24.6 | length 1539.9
  Top Layer w10: U24.6 9154,3916 9154,3701 U21.19
  Bottom Layer w10: U24.6 9092,4062 9092,4145 9317,4370 9750,4370 U22.12
NetU22_9: U22.9
NetU22_11: U22.11
NetU24_3: U24.3 U24.5 | length 234.8
  Top Layer w10: U24.5 9092,4162 9092,4278 U24.3
Q0_H: U2.1 U3.14 | length 3128.5
  Top Layer w10: U3.14 5877,2527 5877,2887 5856,2908 5824,2908 5766,2850 5766,2008 5783,1991 5783,1754 5807,1730 5960.59,1730 5980.59,1750 v1(6145,1750) ; v1(6994,1675) 6994,1769 U2.1
  Bottom Layer w10: v1(6145,1750) 6145,1739.18 6156.78,1727.39 6156.78,1725.21 6179.83,1702.17 6207,1675 v1(6994,1675)
Q0_V: U12.1 U13.14 U14.4 U17.4 | length 1975.1
  Top Layer w10: U13.14 5793.47,4324.86 5793.47,4416 5810.81,4433.33 U12.1 ; U17.4 6828,3692 6828,4039.67 U14.4
  Bottom Layer w10: U13.14 6069.67,4283.33 6261.19,4091.81 6322,4091.81 6378.19,4148 6803.67,4148 U14.4
Q1_H: U2.3 U3.13 U4.2 U7.2 U20.2 | length 5979.5
  Top Layer w10: U3.13 5912,2462 5912,2700 5952,2740 6071,2740 6194,2617 6388,2617 6438,2567 6816,2567 6855,2528 U2.3 ; U4.2 7515,2185 7515,1920 7546.47,1888.53 7771.47,1888.53 U7.2 7830,1633 7880,1583 7880,1504 7896,1488 8206,1488 8222,1504 8222,1706 8322,1806 8322,2389 8288,2423 8192,2423 8159,2456 8159,2735.3 U20.2
  Bottom Layer w10: U2.3 6897,1788 7670.35,1788 7686.87,1771.47 7771.47,1771.47 U7.2
Q1_V: U12.3 U13.13 | length 165.7
  Bottom Layer w10: U13.13 5885,4233.33 U12.3
Q2_H: U2.5 U3.12 U20.3 | length 5124.4
  Top Layer w10: U3.12 5952,2148 5952,1935 5984,1903 6025,1903 6072,1856 6072,1824 6108,1788 6212,1788 v1(6240,1760) ; v1(8066,3123) 8241,2948 8241,2717.3 U20.3
  Bottom Layer w10: U3.12 5575,2525 5502,2525 5483,2544 5483,2717 6260,2717 6607,3064 6972,3064 7031,3123 v1(8066,3123) ; v1(6240,1760) 6585,1760 U2.5
Q2_V: U12.5 U13.12 U17.6 U18.6 | length 1481
  Top Layer w10: U18.6 6628,3260.33 6628,3590.94 6628.53,3591.47 6628.53,3608.53 U17.6
  Bottom Layer w10: U13.12 5885,4033.33 U12.5 6307.33,3706 6614,3706 U17.6
Q3_H: U1.4 U2.13 U3.11 U8.3 U20.4 | length 6030.8
  Top Layer w10: U2.13 7215,1790 7215,2530 7265,2580 U1.4 ; U20.4 8479,2304.7 8479,1931 U8.3
  Bottom Layer w10: U3.11 5783,2133 5485,2133 5466,2114 5466,1778 5525,1719 5728,1719 5772,1675 5772,1472 5796,1448 7041,1448 7097,1504 7097,1552 7077,1572 6997,1572 U2.13 ; U1.4 7315,2625 7628,2625 7661.53,2658.53 8125.17,2658.53 U20.4
Q3_V: U11.11 U12.13 U13.11 U14.11 U17.11 U20.9 | length 5245.3
  Top Layer w10: U11.11 6870,4169 6912,4127 6912,3952 6870,3910 U14.11 6870,3736 6912,3694 6912,3521 6870,3479 U17.11 6870,3286 6928,3228 6928,3109 7012,3025 7012,2551 6923.47,2462.47 6923.47,2352.53 7015,2261 v1(7015,2049)
  Bottom Layer w10: U13.11 5793,4025.33 5793,4416 5810,4433 5896,4433 5938,4391 6222.33,4391 U12.13 6750,4333.33 U11.11 ; v1(7015,2049) 7048,2082 7290,2082 7350,2142 8141.7,2142 U20.9
Q4_H: U2.11 U4.5 U6.14 U7.5 U20.5 | length 5761.9
  Top Layer w10: U6.14 6241,2416 6241,2272 6280,2233 6371,2233 6433,2171 ; v1(6568,2171) 6433,2171 ; U7.5 7530,1687.18 7642.42,1574.76 7672,1572 7672,1500 7712,1460 ; U20.5 8276,2480 8422,2334 8422,1762 8330,1670 8330,1502 8288,1460 7712,1460 ; 6433,2171 6432,2171 6413,2152 6413,1504 6429,1488 6589,1488 6605,1504 6605,1564 6613,1572 6713,1572 U2.11 6823,1462 7712,1460
  Bottom Layer w10: v1(6568,2171) 6801,2171 ; U4.5 7123,2277 6923,2277 ; 6801,2171 6817,2171 6923,2277 ; 6801,2171 6907,2277 6923,2277
Q4_V: U11.1 U14.1 U16.14 U17.1 U18.1 U23.2 | length 3619.1
  Top Layer w10: U18.1 7128,3260.33 7128,3608 U17.1 7128,3692 7128,4039.67 U14.1 7128,4123.67 7128,4471.33 U11.1 7170,4278.7 U23.2
  Bottom Layer w10: U16.14 5891.33,3302 7086.33,3302 U18.1
Q5_H: U2.9 U6.13 U7.6 U20.6 | length 3666.1
  Top Layer w10: U6.13 6396.94,2278.06 6566.94,2278.06 6605,2240 6605,1605.53 6588,1588.53 6588,1563 U2.9 ; v1(7373,1637) 7373,1773 U7.6 ; v1(8094,1820) 8159,1885 8159,2000 8176,2017 8204,2017 8267,2080 8267,2316.7 U20.6
  Bottom Layer w10: U2.9 6632,1607 7343,1607 v1(7373,1637) ; U7.6 7471.53,1871.53 7672,1871.53 7680,1804 7695.53,1788.47 7755.47,1788.47 7788.47,1821.47 7788.47,1852 7808,1871.53 8042.47,1871.53 v1(8094,1820)
Q5_V: U12.9 U16.13 U18.12 U23.3 | length 5583.3
  Top Layer w10: U12.9 6408,3805.33 6408,3176 6503,3081 6807.33,3081 U18.12
  Bottom Layer w10: U16.13 5884.33,3209 6313,3209 6346,3176 6992,3176 7012,3196 7012,3232 7040,3260 7088,3260 7112,3236 7112,3200 7136,3176 7264,3176 7398,3310 7608,3310 7626,3328 7626,3632 ; U12.9 6238,3891.33 6238,3809 6324,3723 6995,3723 7012,3706 7012,3648 7052,3608 7602,3608 7626,3632 ; U23.3 7626,3722.7 7626,3632
Q6_H: U1.11 U4.11 U6.12 U7.11 U9.13 U20.7 | length 3570.6
  Top Layer w10: U6.12 6258.47,2316.53 6258.47,2400 6275,2416.53 6324.53,2416.53 6375,2467 6717,2467 U9.13 ; U1.11 7265,2326 7307,2284 7307,1977 U4.11 7328.47,1871.53 7450.47,1871.53 7480,1842 7480,1680 U7.11
  Bottom Layer w10: U9.13 6733,2483 6733,2400 6750,2383 6817,2383 6851,2417 7223,2417 U1.11 7323.53,2433.53 7600.47,2433.53 7776,2258 8181.7,2258 U20.7
Q6_V: U11.2 U14.2 U16.12 U17.2 U18.2 U23.4 | length 3270.2
  Top Layer w10: U18.2 7028,3260.33 7028,3479 7070,3521 U17.2 7070,3695 7028,3737 7028,3910 7070,3952 U14.2 7070,4126 7028,4168 7028,4471.33 U11.2
  Bottom Layer w10: U16.12 5885.33,3108 6959.67,3108 U18.2 ; U17.2 7136,3716 7532.7,3716 U23.4
Q7_H: U1.12 U4.12 U6.11 U7.12 U9.11 U20.8 | length 3848.5
  Top Layer w10: U1.12 7407,2333 7407,1977 U4.12 7407.74,1892.26 7467.8,1892.26 7488.53,1871.53 7572,1871.53 7580,1863.53 7580,1704.12 7651.63,1632.49 7651.63,1616 7675.57,1592.06 7684,1592.06 7692.06,1584 7692.06,1567.94 U7.12
  Bottom Layer w10: U6.11 6258,2217 6258,2496 6287,2525 6398,2525 6448,2475 6625,2475 U9.11 7016.47,2325 7025,2316.47 7306.47,2316.47 U1.12 ; U4.12 7407,1977 7607,1977 7648,1936 8225,1936 8241,1952 8241,2142.7 U20.8
Q7_V: U16.11 U23.5 | length 2406.7
  Top Layer w10: v1(5793,3625) 5793,3100.33 U16.11
  Bottom Layer w10: v1(5793,3625) 6464,3625 6529,3560 U23.5
Q8_H: U8.12 U9.9 U10.14 | length 3867.3
  Top Layer w10: U10.14 6170.51,1670.51 6253.22,1670.51 6294.7,1712 6294.7,1890.3 v1(6247,1938)
  Bottom Layer w10: U10.14 6069.22,1578.22 6128.78,1637.78 7310.78,1637.78 7347,1674 7987,1674 8040,1621 8489,1621 U8.12 ; v1(6247,1938) 6251.53,1933.47 6323,1933.47 6456.53,2067 6562,2067 6620,2125 U9.9
Q8_V: U19.14 U23.6 | length 1350.8
  Bottom Layer w10: U19.14 6381.67,3460 U23.6
Q9_V: U11.3 U14.3 U17.3 U18.3 U19.13 U24.1 U24.2 | length 4332.3
  Top Layer w10: U18.3 6928,3260.33 6928,3479 6970,3521 U17.3 6970,3694 6928,3736 6928,3911 6970,3953 U14.3 6970,4126 6928,4168 6928,4471.33 U11.3 ; U24.2 U24.1
  Bottom Layer w10: U19.13 6506.33,3258.33 6508,3260 6928.33,3260 U18.3 ; U11.3 7027.67,4571 8999,4571 U24.1
Q\0\_H: U1.1 U2.2 U4.1 U7.1 | length 3254.3
  Top Layer w10: U2.2 7018,1893 7088,1893 7107,1912 7107,2512 7215,2620 7215,2700 7232,2717 7523,2717 U1.1 7523,2633 7523,2277 U4.1
  Bottom Layer w10: U2.2 6913.47,1871.53 6832,1871.53 6813.47,1853 6813.47,1799.53 6846.66,1766.34 7078.66,1766.34 7090.53,1754.47 7854.47,1754.47 U7.1
Q\0\_V: U11.4 U12.2 U18.4 | length 2960.2
  Top Layer w10: U12.2 6189,4124.33 ; U18.4 6827.67,3176 6553,3176 6497,3232 6497,3801 6323,3975 6240,3975 6189,4026 6189,4124.33 ; U11.4 6807.33,4576 6410,4576 6378,4544 6378,4099 6370,4091 6222.33,4091 6189,4124.33
Q\1\_H: U1.2 U2.4 U8.1 | length 4308.1
  Top Layer w10: U8.1 8780,2279 v1(8842,2341)
  Bottom Layer w10: U2.4 6839,1746 7065,1746 7078.91,1732.09 8238.09,1732.09 8256,1750 8700,1750 U8.1 ; U1.2 7507,2717 8306.39,2717 8480,2543.39 8585,2543.39 8606.61,2565 8784,2565 8842,2507 v1(8842,2341)
Q\1\_V: U11.5 U12.4 U14.5 U17.5 U18.5 | length 2285.2
  Top Layer w10: U18.5 6728,3260.33 6728,3608 U17.5 6728,3692 6728,4039.67 U14.5 6728,4123.67 6728,4471.33 U11.5
  Bottom Layer w10: U12.4 6121.53,3991.81 6680.14,3991.81 U14.5
Q\2\_H: U1.3 U2.6 U4.3 U7.3 U8.2 | length 3403.9
  Top Layer w10: U4.3 7365,2284 7323,2326 7323,2633 U1.3
  Bottom Layer w10: U2.6 6584.34,1859.34 6584.34,1872 6601.34,1889 6944,1889 ; U4.3 7239,2109 6976,2109 6923,2056 6923,1910 6944,1889 ; U8.2 8621.47,1888.53 7788.53,1888.53 U7.3 7700.7,1859.3 7700.7,1872 7683.7,1889 6944,1889
Q\2\_V: U11.6 U12.6 U14.6 | length 2699
  Top Layer w10: U14.6 6628,4123.67 6628,4471.33 U11.6
  Bottom Layer w10: U12.6 5787.67,3933.33 5753,3968 5753,4070 5598,4225 5520,4225 5493,4252 5493,4520 5503,4530 5546,4530 5664,4648 6535.33,4648 U11.6
Q\3\_H: U2.12 U4.4 U7.4 | length 2502
  Top Layer w10: v1(6713,2283.47) 6713,1672 U2.12 ; U7.4 7695,1765 v1(7695,1629)
  Bottom Layer w10: v1(6713,2283.47) 6806.47,2283.47 6817,2294 7206,2294 U4.4 ; U2.12 6915,1590 7656,1590 v1(7695,1629)
Q\3\_V: U12.12 U18.11 | length 2467.4
  Top Layer w10: U12.12 6138.33,4375 5961,4375 5938,4352 5938,4208 5963,4183 6094,4183 6115,4162 6115,3932 6386,3661 6386,3128 6504,3010 6778.33,3010 U18.11
Q\4\_H: U1.5 U2.10 U8.4 | length 6043.1
  Top Layer w10: U2.10 6748,1437 8587,1437 8622,1472 8622,1688 8550,1760 ; U8.4 8550,1760 ; v1(8576,2917) 8576,2042 8624,1994 8624,1792 8592,1760 8550,1760
  Bottom Layer w10: U1.5 7123.47,2633.47 6944,2633.47 6923,2654.47 6923,2985.12 7036.88,3099 7808,3099 7990,2917 v1(8576,2917)
Q\5\_H: U1.6 U2.8 U4.6 U8.5 | length 4774.1
  Top Layer w10: U4.6 7032,2268 7032,2293.53 7023,2302.53 7023,2504 7065,2546 U1.6 ; v1(8293,1713) 8380,1800 U8.5
  Bottom Layer w10: U2.8 6413,1572 6093,1572 6088,1567 6088,1528 6048,1488 6004,1488 5988,1504 5988,1856 6013,1881 6544,1881 ; U4.6 6813,1983 6646,1983 6544,1881 ; v1(8293,1713) 7048,1713 7032,1729 6794,1729 6697,1826 6697,1856 6681,1872 6621,1872 6605,1856 6605,1821.27 6572.2,1788.47 6533,1788.47 6513.47,1808 6513.47,1850.47 6544,1881
Q\5\_V: U11.12 U12.8 U14.12 U17.12 | length 1644.3
  Top Layer w10: U17.12 6970,3479 7012,3521 7012,3694 6970,3736 U14.12 6970,3910 7012,3952 7012,4127 6970,4169 U11.12
  Bottom Layer w10: U12.8 6918.33,3833.33 U14.12
Q\6\_H: U8.6 U9.12 | length 2113.6
  Top Layer w10: v1(8046,2306) 8046,1801 8064,1783 8233,1783 U8.6
  Bottom Layer w10: U9.12 6808,2458 7637,2458 7737,2358 7842,2358 7894,2306 v1(8046,2306)
Q\7\_H: U8.11 U9.10 | length 5683.7
  Bottom Layer w10: U9.10 6601,2225 6559,2267 6448,2267 6432,2251 6432,2083 6382,2033 6272,2033 6088,2217 5494,2217 5449,2172 5449,1343 5469,1323 7039,1323 7288,1572 7720,1572 7794,1646 7975,1646 8018,1603 8407,1603 U8.11
Q\8\_H: U9.8
VGA_D\M\A\: P1.5
pads on no net: P1.8 P1.17 P1.27 P1.28 U1.9 U1.10 U1.13 U3.3 U3.4 U3.5 U3.6 U4.9 U4.10 U4.13 U6.3 U6.4 U6.5 U6.6 U7.9 U7.10 U7.13 U8.9 U8.10 U8.13 U9.1 U9.2 U9.3 U9.4 U9.5 U9.6 U10.3 U10.4 U10.5 U10.6 U10.11 U10.12 U10.13 U10.15 U11.9 U11.10 U11.13 U12.10 U12.11 U13.3 U13.4 U13.5 U13.6 U14.9 U14.10 U14.13 U16.3 U16.4 U16.5 U16.6 U17.9 U17.10 U17.13 U18.9 U18.10 U18.13 U19.3 U19.4 U19.5 U19.6 U19.11 U19.12 U19.15 U21.8 U21.9 U21.11 U21.12 U22.1 U22.2 U22.3 U22.4 U22.5 U22.6 U22.7 U22.8 U22.14 U24.7 U24.8 U24.9 U24.10 U24.11 U24.12 U24.13 U24.14 VGA.4 VGA.9 VGA.11 VGA.12 VGA.15 VGA.16 VGA.17 X1.1

## Polygon pours and split planes (outlines as drawn)
GND on Bottom Layer "NONET_L-01_P-001" (solid, pour order 0): 10122.5,1290 5417.5,1290 5417.5,4775 10122.5,4775
+5 on Top Layer "NONET_L-01_P-001" (solid, pour order 1): 10117.5,4775 10117.5,1290 5412.5,1290 5412.5,4775

## Silkscreen, mask and mechanical layers (free items; w line width, h text height)
Top Overlay:
  circle w10: c9765,3455 r194.74
  text "NAND" at 7420,4330 h60
  text "8-BIT NAND" at 6575,4328.33 h60
  text "NAND" at 9225,3925 h60 r90
  text "8-BIT NAND" at 6575,3896.67 h60
  text "D-FLIP FLOP" at 9675,3895 h60 r90
  text "4b COUNTER" at 5710,3828.33 h60 r90
  text "6 INVERTER" at 6150,3825 h60 r90
  text "8-BIT NAND" at 6575,3465 h60
  text "6502" at 9650,3465 h60
  text "MJ" at 9720,3380 h60
  text "OCTAL BUS TRCVR" at 7770,3055 h60 r90
  text "8-BIT NAND" at 6575,3033.33 h60
  text "4b COUNTER" at 5710,2903.33 h60 r90
  text "4b COUNTER" at 6155,2903.33 h60 r90
  text "OCTAL BUS TRCVR" at 9178.7,2740 h60 r90
  text "8-BIT NAND" at 6970,2490 h60
  text "VGA" at 9945,2300 h60 r90
  text "8-BIT NAND" at 6970,2050 h60
  text "4b COUNTER" at 5700,2020 h60 r90
  text "4b COUNTER" at 6175,2020 h60 r90
  text "6 INVERTER" at 6650,2016.67 h60 r90
  text "NAND" at 7985,2005 h60 r90
  text "OCTAL BUS TRCVR" at 8385,1975 h60 r90
  text "6 INVERTER" at 6446.67,1660 h60
  text "4b COUNTER" at 5575,1655 h60
  text "8-BIT NAND" at 7335,1645 h60
  text "8-BIT NAND" at 8185,1645 h60
Mechanical 6:
  the board outline again, w2.7

## Text inside footprints (layer, text, board x,y; h text height)
P1: Top Overlay "2" at 8674.57,2319.33 h40 r90; Top Overlay "1" at 8780.87,2331.14 h40 r90; Top Overlay "39" at 8780.87,4383.11 h40 r90; Top Overlay "40" at 8674.57,4383.11 h40 r90